# Altium PCB USB转接板.PcbDoc
Units mil, origin at the board's own origin, x right, y up, seen from the top; angles counter-clockwise.
Board outline 1875 x 610 mil, 2 copper layers (Top Layer, Bottom Layer); 19 components, 9 nets, 53 pads, 13 vias.
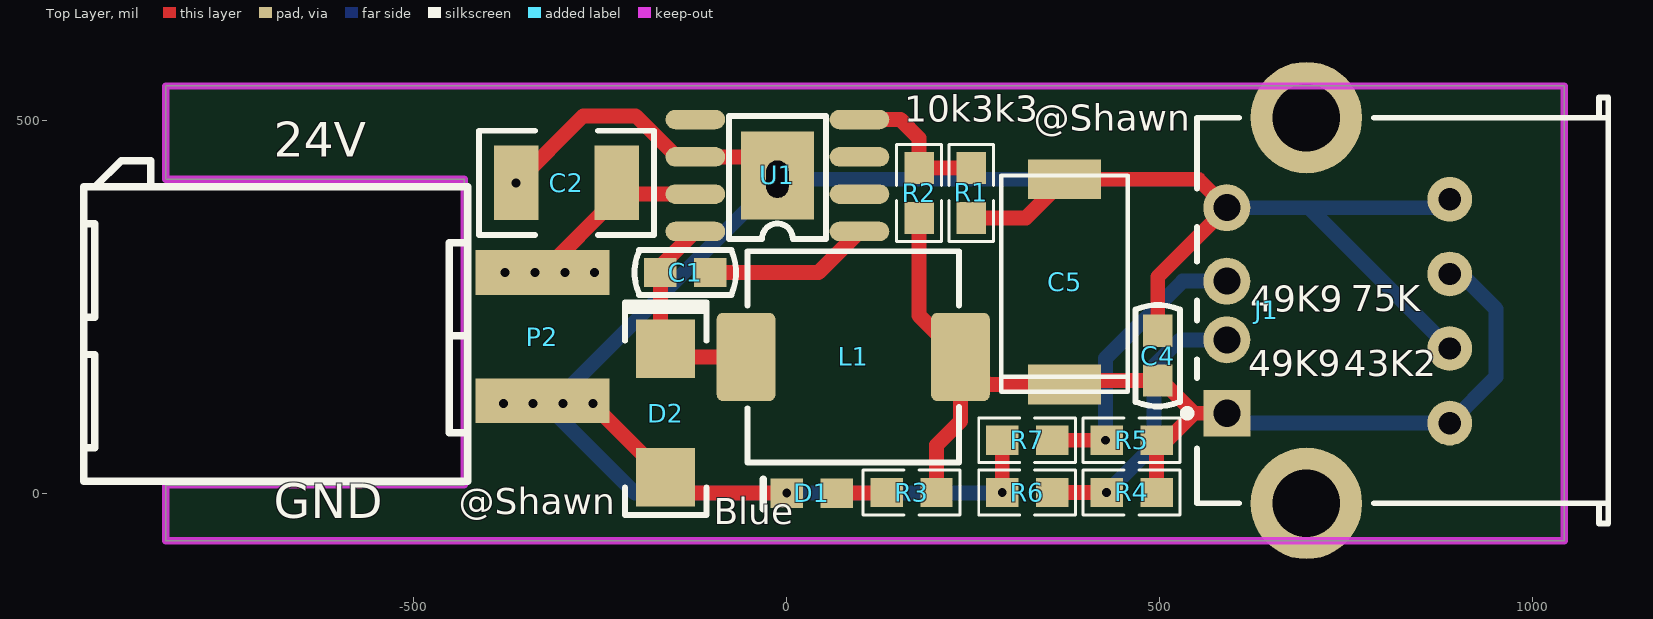
[diagram p0: Top Layer view]
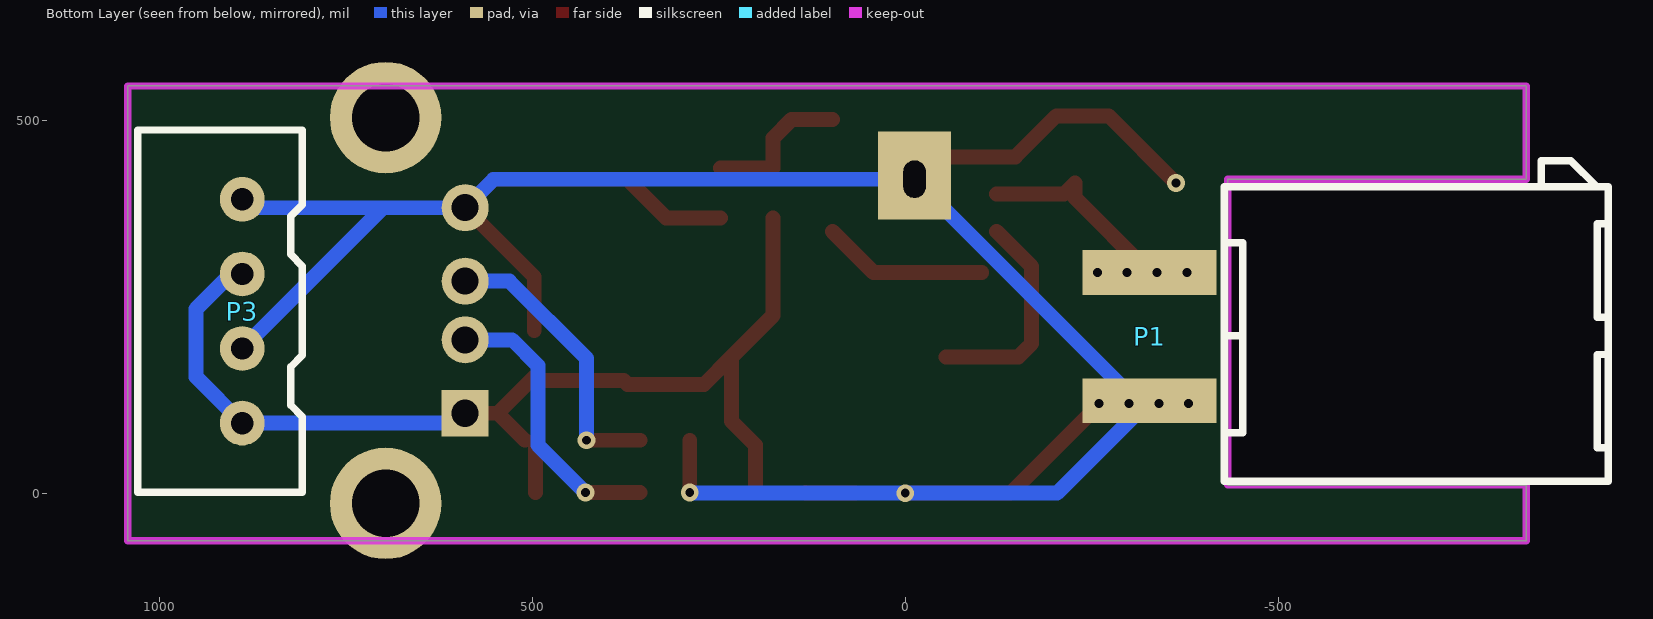
[diagram p1: Bottom Layer view, seen from below]

## Layer stack, top to bottom
Top Solder: solder mask 0.4, Solder Resist, Dk 3.5
Top Layer: signal copper 1.4
Dielectric 1: dielectric 12.6, FR-4, Dk 4.8
Bottom Layer: signal copper 1.4
Bottom Solder: solder mask 0.4, Solder Resist, Dk 3.5

## Board outline
-832.54,-64 -832.54,11 -432.54,11 -432.54,421 -832.54,421 -832.54,546 1042.46,546 1042.46,-64

## Design rules (kind name [scope] priority, off if disabled: settings)
Clearance [All] p1: gap=10
HoleSize [All] p1: absolutevalues=TRUE maxlimit=233 minlimit=1 maxpercent=80.000 minpercent=20.000
HoleToHoleClearance [All] p1: gap=0 allowstackedmicrovias=TRUE
MinimumSolderMaskSliver [All] p1: minsoldermaskwidth=0
PolygonConnect [All] p1: connectstyle=Direct reliefconductorwidth=10 reliefentries=4 polygonreliefangle="90 Angle" airgapwidth=10
RoutingVias [All] p1: holewidth=28 width=50 viastyle="Through Hole" minholewidth=1 minwidth=1 maxholewidth=2333 maxwidth=2333
SilkToSilkClearance [All] p1: silktosilkclearance=0
SilkToSolderMaskClearance [IsPad] p1: minsilkscreentomaskgap=0 clearancetoexposedcopper=TRUE
SolderMaskExpansion [All] p1: expansion=4
Width [All] p1: maxlimit=2333 minlimit=10 preferedwidth=10
25 further rules are at their usual default settings.

## Components (designator, comment, footprint, x,y, rotation, side; value= is the part's Value field where it differs from the comment)
C1 "105" 0603C -137.54,296 r0 top
C2 "100uF" 1201C -292.54,416 r270 top
C4 "104" 0603C 497.46,186 r270 top
C5 "CAP_钽220" cap_钽E封装 367.46,286 r180 top
D1 "LED" LED_0603 32.46,1 r180 top
D2 "Diode_SS34" Diode_SS34 -162.54,106 r90 top
J1 "USB_seat" USB_SEAT 842.46,251 r0 top
L1 "15uH" Inductor7.2X7.2 82.46,181 r0 top
P1 "Header2X1" Header_PWR_seat#1 -327.54,-564 r0 bottom
P2 "Header2X1" Header_PWR_seat#2 -327.54,-564 r0 top
P3 "Header4" Header4_white 920,244 r90 bottom
R1 "3k3" 0603R 247.46,402.54 r270 top
R2 "10k" 0603R 177.46,402.54 r90 top
R3 "1K" 0603R 167.46,1 r0 top
R4 "43K2" 0603R 462.46,1 r0 top
R5 "75K" 0603R 462.46,71 r0 top
R6 "49K9" 0603R 322.46,1 r0 top
R7 "49K9" 0603R 322.46,71 r0 top
U1 "TPS5430/5450" TPS5430 -22.54,416 r180 top

## Footprints (in the part's own frame and the unit in brackets; to place one, negate y for a bottom-side part, rotate by r counter-clockwise, add the part's x,y. Pads: shape width x height; smd on the part's side, far side on the other; paste and mask are expansions set on the pad)
0603C [mm]
  rect 1.1x1 smd: 1(-0.811,0) 2(0.889,0)
  silkscreen extent -1.69,-0.76 1.77,0.76, body extent -1.29,-0.47 1.31,0.53, height 0.89
0603R [mm]
  rect 1.1x1 smd: 1(-0.85,0) 2(0.85,0)
  silkscreen extent -1.65,-0.76 1.65,0.76, body extent -0.8,-0.4 0.8,0.4, height 0.45
1201C [mil]
  rect 100x60 smd: 1(0,64.72) 2(0,-70.28)
  silkscreen extent -70,-120 70,115, body extent -65,-115 65,110, height 100
cap_钽E封装 [mil]
  rect 98.43x53.54 smd: 1(-5,-135) 2(-5,140)
  silkscreen extent -90,-140 80,150, body extent -90,-165 80,170, height 161
Diode_SS34 [mm]
  rect 2x2 smd: 1(-2.15,0) 2(2.225,0)
  silkscreen extent -3.43,-1.4 3.81,1.38, body extent -2.4,-1.4 2.45,1.38, height 1.4
Header4_white [mil]
  round 60 hole 30: 1(-150,-31) 2(-50,-31) 3(50,-31) 4(150,-31)
  silkscreen extent -243,-112 243,109
Header_PWR_seat#1 [mil]
  rect 180x60 smd: 1(0,-860) 2(0,-688)
  silkscreen extent -615,-1010 -100,-580
Header_PWR_seat#2 [mil]
  rect 180x60 smd: 1(0,860) 2(0,688)
  silkscreen extent -615,580 -100,1010
Inductor7.2X7.2 [mm]
  rrect20% 2x3 smd: 1(-3.479,0.044) 2(3.821,0.044)
  silkscreen extent -3.43,-3.56 3.77,3.64, body extent -3.4,-3.56 3.76,3.63, height 4
LED_0603 [mm]
  rect 1.1x1 smd: 1(-0.875,0.025) 2(0.825,0.025)
  silkscreen extent 1.63,-0.46 1.63,0.56, body extent -1.52,-0.51 1.4,0.64, height 0.66
TPS5430 [mil]
  oval 80x26 smd: 1(-120,65) 2(-120,15) 3(-120,-35) 4(-120,-85) 5(100,-85) 6(100,-35) 7(100,15) 8(100,65)
  oval 50x70 hole 30 slot 50 at 90 deg: 6(-10,-5)
  rect 98x118 smd: 6(-10,-10)
  rect 98x118 smd far side: 6(-10,-10)
  silkscreen extent -75,-90 55,75, body extent -80,-100 60,80, height 30
USB_SEAT [mm]
  rect 1.6x1.6 hole 0.92: 1(-6.411,-3.652)
  round 1.6 hole 0.92: 2(-6.411,-1.152) 3(-6.411,0.848) 4(-6.411,3.348)
  round 3.8 hole 2.3: 5(-3.701,6.418) 6(-3.701,-6.722)
  silkscreen extent -7.89,-7.4 6.58,7.1, body extent -6.1,-7.42 6.55,8.45, height 4.11

## Part data
C1: library part C_106, "0603/0805"
C2: library part CAP100uF
C4: library part C_104, "0603/0805"
C5: "CAP"
D2: "肖特基二极管"
J1: "母座"
L1: library part Inductor, "屏蔽电感"
P1 P2: "power"
R1 R2 R3 R4 R5 R6 R7: library part R, "0603/0805"
U1: "降压"

## Via types
v1: diameter 24, hole 12, Top Layer to Bottom Layer, tented both sides, 13 vias

## Nets (pads, with @x,y where several pads share a name; then routed paths per layer and width w, separated by ;. In a path a pad name is that pad's centre, name@x,y a point inside that pad or via, vN(x,y) a via of type N, cw(c..) or ccw(c..) an arc to the next point about the centre after c; other vN are vias at no path point)
5V: C4.2 C5.2 J1.1 L1.2 P3.1 P3.3 R2.1 R3.2 R4.2 R5.2 | length 1492.2
  Top Layer w20: R2.1 177.46,238.17 L1.2 ; R3.2 200.93,64.46 232.9,96.43 L1.2 ; R4.2 R5.2 ; C4.2 377.46,151 C5.2 269.63,146 L1.2 ; C4.2@497.46,156 546.26,107.2 ; R5.2@510.06,71 546.26,107.2 ; J1.1@584.72,112.54 J1.1 546.26,107.2
  Bottom Layer w20: J1.1 603.25,94 P3.1 951,156 951,247 904,294 P3.3
24V: C2.1 P1.1 P2.1 U1.7 | length 272.8
  Top Layer w20: P2.1 -227.82,395.72 C2.1 -212.82,401 U1.7
  other v1: -377.54,296 -337.54,296 -297.54,296 -257.54,296
D+: J1.3 R5.1 R7.2 | length 388.5
  Top Layer w20: R7.2 v1(427.46,71) R5.1
  Bottom Layer w20: v1(427.46,71) 427.46,181 530.83,284.37 J1.3
D-: J1.2 R4.1 R6.2 | length 381.3
  Top Layer w20: R6.2 v1(429,1)
  Bottom Layer w20: v1(429,1) 492.46,64.46 492.46,171 527.09,205.63 J1.2
GND: C2.2 C4.1 C5.1 D1.2 D2.1 J1.4 P1.2 P2.2 P3.2 P3.4 R1.2 R6.1 R7.1 U1.6 | length 3748.6
  Top Layer w20: v1(-362.82,416) -272.82,506 -202.54,506 -147.54,451 -122.54,451 -42.54,451 U1.6@-12.54,421 ; P2.2 -265.18,124 D2.1 -141.18,0 v1(0,0) ; R1.2 320.54,369.07 C5.1 551.84,421 J1.4 497.46,290.21 C4.1 ; v1(289,1) R7.1
  Bottom Layer w20: v1(289,1) 288,0 v1(0,0) -203.54,0 P1.2 -309.54,124 -12.54,421 551.84,421 J1.4 704,382.8 ; P3.2 704,379 704,382.8 ; P3.4 877.8,382.8 704,382.8
  other v1: -380,120 -340,120 -300,120 -260,120
NetC1_1: C1.1 D2.2 L1.1 U1.8 | length 292.2
  Top Layer w20: U1.8 -169.46,304.07 C1.1 -169.46,200.53 D2.2 -151.67,182.73 L1.1
NetC1_2: C1.2 U1.1 | length 222.8
  Top Layer w20: C1.2 42.46,296 U1.1
NetD1_1: D1.1 R3.1 | length 67.5
  Top Layer w20: D1.1 133,0 R3.1
NetR1_1: R1.1 R2.2 U1.4 | length 200.4
  Top Layer w20: U1.4 152.46,501 177.46,476 R2.2 R1.1
pads on no net: J1.5 J1.6 U1.2 U1.3 U1.5

## Keep-outs
Keep-Out Layer:
  the board outline again, w10

## Silkscreen, mask and mechanical layers (free items; w line width, h text height)
Top Overlay:
  text "@Shawn" at 331,474 h60
  text "24V" at -687.61,436 h80
  text "@Shawn" at -440,-40 h60
  text "GND" at -687.54,-49 h80
  text "Blue" at -97.54,-54 h60

## Dimensions
-832.54,-64 to 1042.46,-64 on Top Overlay
-832.54,546 to -832.54,-64 on Top Overlay